# Altium PCB Pulser_Driver_PCB.PcbDoc
Units mil, origin at the board's own origin, x right, y up, seen from the top; angles counter-clockwise.
Board outline 6290 x 3510 mil, 2 copper layers (Top Layer, Bottom Layer), stack 96.8 mil thick; 49 components, 18 nets, 105 pads, 0 vias.
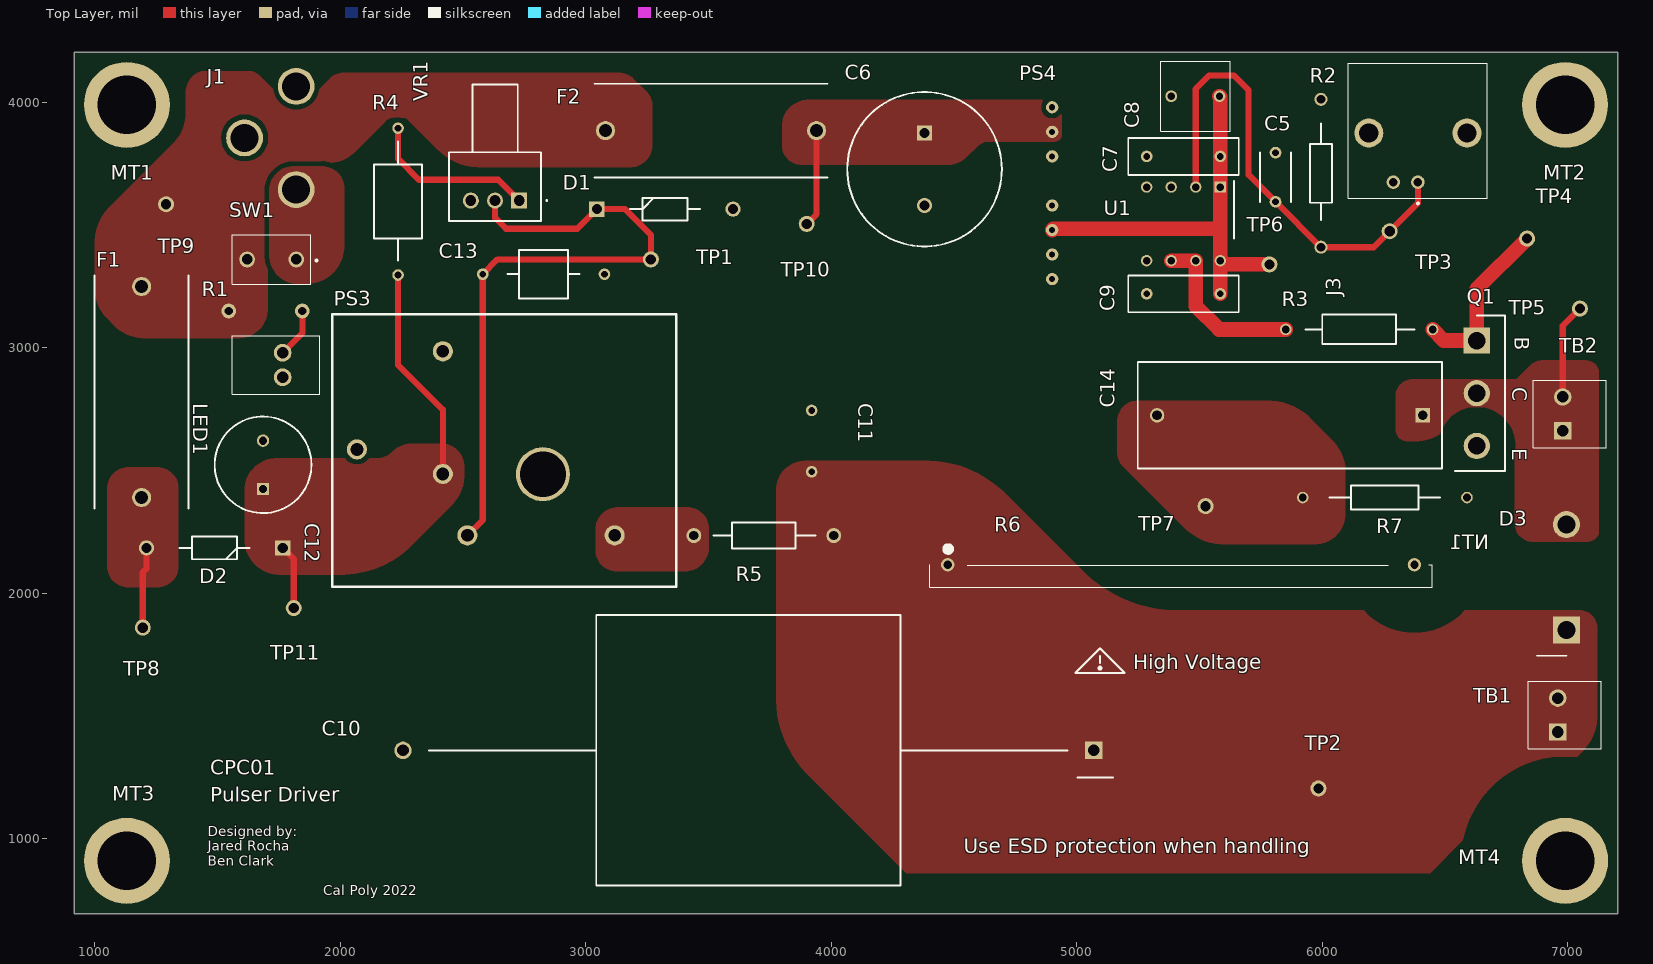
[diagram p0: Top Layer view]
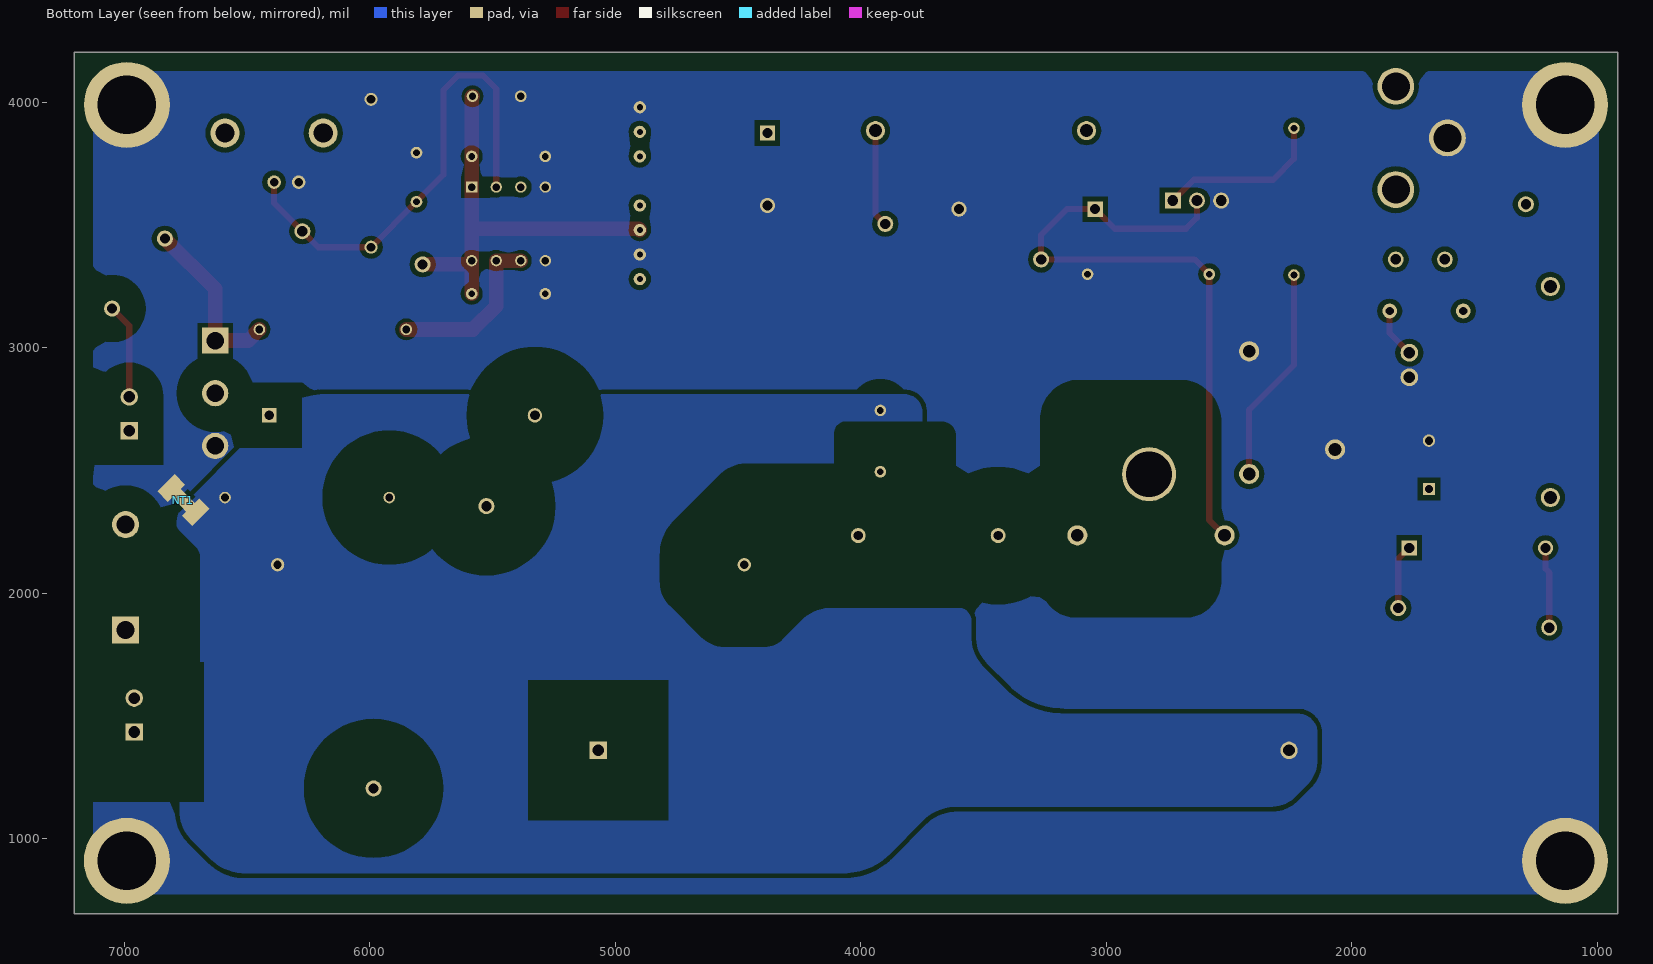
[diagram p1: Bottom Layer view, seen from below]
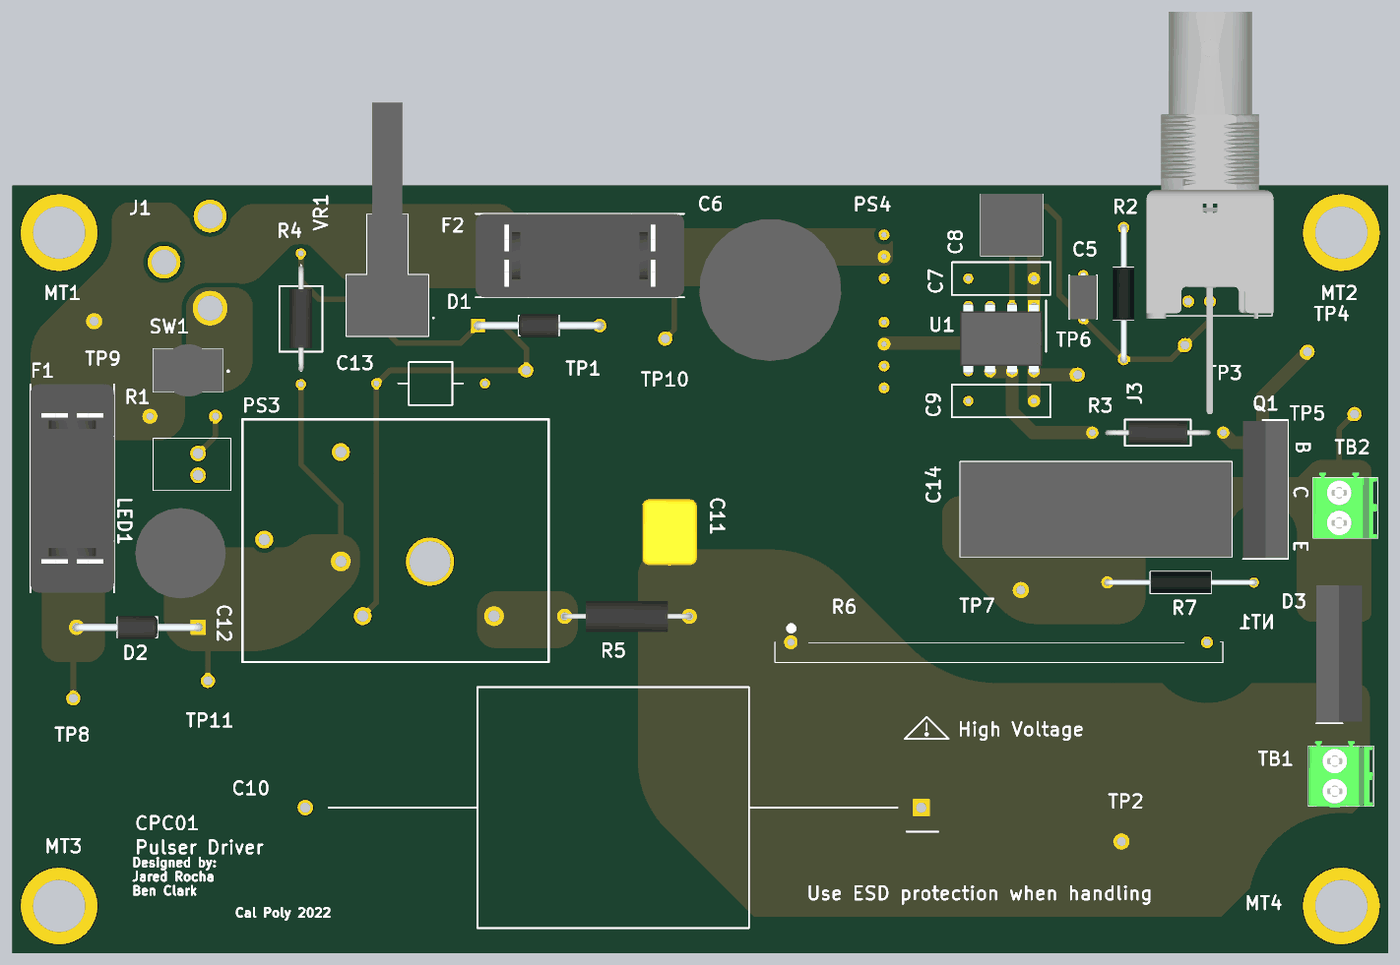
[diagram p2: 3D render of the assembled board from above, using the file's embedded part models]

## Layer stack, top to bottom
Top Solder: solder mask 0.4, Solder Resist, Dk 3.5
Top Layer: signal copper 1.4
Dielectric 1: dielectric 94, FR-4, Dk 4.8
Bottom Layer: signal copper 1.4
Bottom Solder: solder mask 0.4, Solder Resist, Dk 3.5

## Board outline
7205,695 915,695 915,4205 7205,4205

## Design rules (kind name [scope] priority, off if disabled: settings)
BoardOutlineClearance [Not OnLayer('Top Overlay')] p1: gap=78 ignorepadtopadclearanceinfootprint=FALSE except(38: THPad-OutlineEdge THPad-CavityEdge THPad-CutoutEdge THPad-SplitBarrior THPad-SplitContinuation Text-OutlineEdge Text-CavityEdge Text-CutoutEdge Text-SplitBarrior Text-SplitContinuation)
Clearance HV_clear_exception [WithinRoom('HV_cap_clearance_exception') OR WithinRoom('HV_boost_clearance_exception')] p1: gap=250 ignorepadtopadclearanceinfootprint=FALSE except(10: Arc-Text Track-Text SMDPad-Text THPad-Text Via-Text Fill-Text Poly-Text Region-Text Text-Text; 105: Arc-THPad Arc-Hole Track-THPad Track-Hole THPad-THPad THPad-Fill THPad-Poly THPad-Region THPad-Hole Fill-Hole Poly-Hole Region-Hole)
Clearance HV_IGBT_clear [InNetClass('HV_IGBT')] p2: gap=105 ignorepadtopadclearanceinfootprint=FALSE except(10: Arc-Text Track-Text SMDPad-Text THPad-Text Via-Text Fill-Text Poly-Text Region-Text Text-Text Text-Hole)
Clearance HV_general_clear [InNetClass('HV_general')] p3: gap=250 ignorepadtopadclearanceinfootprint=FALSE except(10: Arc-Text Track-Text SMDPad-Text THPad-Text Via-Text Fill-Text Poly-Text Region-Text Text-Text)
Clearance Clearance_1 [All] p4: gap=20 ignorepadtopadclearanceinfootprint=FALSE except(0: Arc-Hole Track-Hole SMDPad-Hole THPad-Hole Via-Hole Fill-Hole Poly-Hole Region-Hole Text-Hole)
Height [All] p1: minheight=0 maxheight=1500 prefheight=500
HoleSize [All] p1: absolutevalues=TRUE maxlimit=250 minlimit=10 maxpercent=80.000 minpercent=20.000
PolygonConnect [All] p1: connectstyle=Direct reliefconductorwidth=10 reliefentries=4 polygonreliefangle="90 Angle" airgapwidth=10
RoomDefinition HV_boost_clearance_exception [False vs False] p1: confinementstyle=ConfineIn formatcopy=TRUE lockcomponents=FALSE outline 2690,2630 3200,2630 3200,2130 2690,2130
RoomDefinition HV_cap_clearance_exception [False vs False] p2: confinementstyle=ConfineIn formatcopy=TRUE lockcomponents=FALSE outline 3875,2790 3965,2790 3965,2455 3875,2455
RoutingVias [All] p1: holewidth=28 width=50 viastyle="Through Hole" minholewidth=28 minwidth=50 maxholewidth=28 maxwidth=50
SolderMaskExpansion [All] p1: expansion=4 istentingtop=FALSE
Width [All] p1: maxlimit=100 minlimit=25 preferedwidth=25 minimp=50.000000 maximp=50.000000 favimp=50.000000
28 further rules are at their usual default settings.

## Classes and differential pairs
net class HV_IGBT: COIL_RETURN
net class HV_general: HV_OUT HV_PIN SNUB
component class Pulser_Top: C10 D3 MT1 MT2 MT3 MT4 NT1 R6 TB1 TB2
component class "IGBT Driver Circuit": C6 C7 C8 C9 C14 PS4 Q1 R3 R7 TP4 TP5 TP6 TP7 U1
component class "Chargin Cap 1.25kV Circuit": C11 C12 C13 D1 D2 PS3 R4 R5 TP1 TP2 TP11 VR1
component class "12V DC": C5 F1 F2 J1 J2 J3 LED1 R1 R2 SW1 TP3 TP8 TP9 TP10

## Components (designator, comment, footprint, x,y, rotation, side; value= is the part's Value field where it differs from the comment)
C5 "C325C201K3G5TA" C325C201K3G5TA 5810,3595 r90 top
C6 "220 uF" CAPPRD750W85D1600H2700 4380,3875.28 r270 top
C7 "Cap" RAD-0.3 5435,3780 r0 top value=0.1uF
C8 "Cap" MKS2D041001K00KSSD 5581.85,4025 r180 top
C9 "Cap" RAD-0.3 5435,3220 r0 top value=0.1uF
C10 "0.68uF" MKP1839468134HQ 5176.88,1360 r180 top
C11 "2.2nF" C331C222KHR5HA 3920,2495 r90 top
C12 "120 uF" CAPPRD500W65D1000H1400 1685,2425 r90 top
C13 "0.1uF" C420C104K5R5TA7200 2580,3300 r0 top
C14 "0.01uF" FKP1U021006B00MSC9 6410,2725 r180 top
D1 "1N5819-E3_54" DIOAD1405W86L465D235 3044.88,3565 r0 top
D2 "1N4933G" DIOAD1405W86L465D235 1765,2185 r180 top
D3 "DSDI60-18A" TO546P530X1586X2594-2P 6995,1850.08 r90 top
F1 "4527" 4527 1190,2820 r270 top
F2 "4527" 4527 3510,3885 r0 top
J1 "57-PJ60" 57-PJ60 1820,3855 r180 top
J3 "031-5640" 031-5640 6390,3675 r0 top
LED1 "550-2407F" 5502407F 1765,2980 r270 top
MT1 "239mil" MTHOLE_239mil 1130,3990 r0 top
MT2 "239mil" MTHOLE_239mil 6990,3990 r0 top
MT3 "239mil" MTHOLE_239mil 1130,910 r0 top
MT4 "239mil" MTHOLE_239mil 6990,910 r0 top
NT1 "Net tie 50mil" NET_TIE_50mil 6759.5,2379.5 r225 bottom net-tie
PS3 "C12" C12 2417.52,2485.98 r180 top
PS4 "AM2G-1218DH30Z" AM2G-1218DH30Z 4900,3980 r270 top
Q1 "IXBX75N170" TO545P521X1594X2566-3P 6630,3029.57 r270 top
R1 "1k" CMF551K0000FKR6 1545,3150 r0 top
R2 "CMF5550R000FKEK70" RESAD1526W69L610D229 5995,3410 r90 top
R3 "2ohm" F2W2D0 5851.57,3075 r0 top
R4 "14k" MFR-25FBF52-14K 2235,3296.57 r90 top
R5 "2M" HHV1WSJT-73-2M 3440,2235 r0 top
R6 "100M" HB3100MFZRE 5425,2070 r0 top
R7 "6.2" RESAD1700W60L700D250 5920.71,2390 r0 top
SW1 "T102SHCQE" T102SHCQE 1820,3360 r90 top
TB1 "1984617" 1984617 6960,1435 r90 top
TB2 "1984617" 1984617 6980,2662.2 r90 top
TP1 "5261" 5261 3265,3360 r180 top
TP2 "5261" 5261 5985,1205 r0 top
TP3 "5261" 5261 6275,3475 r0 top
TP4 "5261" 5261 6835,3445 r270 top
TP5 "5261" 5261 7050,3160 r0 top
TP6 "5261" 5261 5785,3340 r0 top
TP7 "5261" 5261 5525,2355 r0 top
TP8 "5261" 5261 1195,1860 r0 top
TP9 "5261" 5261 1290,3585 r0 top
TP10 "5261" 5261 3900,3505 r0 top
TP11 "5261" 5261 1810,1940 r0 top
U1 "MIC4452YN" DIP762W57P254L952H343Q8N 5435,3505 r270 top
VR1 "P9A1R100FISX1103MA" P9A1R100FISX1103MA 2728.43,3600 r270 top

## Footprints (in the part's own frame and the unit in brackets; to place one, negate y for a bottom-side part, rotate by r counter-clockwise, add the part's x,y. Pads: shape width x height; smd on the part's side, far side on the other; paste and mask are expansions set on the pad)
031-5640 [mm]
  round 1.4 hole 0.9: 1(0,0) 2(-2.54,0)
  round 3 hole 2: 3(5.08,5.08) 4(-5.08,5.08)
  silkscreen extent -7.2,-2.3 7.2,12.33, body extent -7.37,-13.08 7.37,33.66, height 16.07
57-PJ60 [mil]
  round 150 hole 114: 1(0,210.5) 2(210.5,0) 3(0,-210.5)
4527 [mm]
  round 1.97 hole 1.32: 1(-10.92,0) 2(10.92,0)
  silkscreen extent -12.08,-4.85 12.08,4.85, body extent -12.1,-4.85 12.1,4.85, height 10.69
5261 [mm]
  round 1.66 hole 1.06: 1(0,0)
1984617 [mm]
  rect 1.8x1.8 hole 1.2: 1(0,0)
  round 1.8 hole 1.2: 2(3.5,0)
  silkscreen extent -1.75,-4.5 5.25,3.05, body extent -1.88,-4.5 5.82,3.05, height 9.15
5502407F [mm]
  round 1.83 hole 1.22: 1(0,0) 2(2.54,0)
  silkscreen extent -1.78,-5.2 4.32,3.81
AM2G-1218DH30Z [mil]
  round 50 hole 25: 1(0,0) 2(100,0) 3(200,0) 5(400,0) 6(500,0) 7(600,0) 8(700,0)
C12 [mil]
  round 82 hole 52: 1(0,0) 2(0,-500) 3(-100,250) 4(-700,250) 5(350,-100)
  round 220 hole 187: P(-407.48,0.98)
  silkscreen extent -950,-650 450,460
C325C201K3G5TA [mm]
  round 1.217 hole 0.71: 1(0,0) 2(5.08,0)
  silkscreen extent 0,-1.59 5.08,1.59, body extent -0.25,-1.59 5.34,1.59, height 7.72
C331C222KHR5HA [mm]
  round 1.2 hole 0.7: 1(0,0) 2(6.35,0)
  body extent -0.64,-3.18 6.98,3.18, height 10.91
C420C104K5R5TA7200 [mm]
  round 1.2 hole 0.7: 1(0,0) 2(12.6,0)
  silkscreen extent 2.54,-2.5 10.03,2.5, body extent 3.81,-2.54 8.89,2.54, height 5.21
CAPPRD500W65D1000H1400 [mm]
  rect 1.275x1.275 hole 0.85: 1(0,0)
  round 1.275 hole 0.85: 2(5,0)
  silkscreen extent -2.5,-5 7.5,5, body extent -2.75,-5.25 7.75,5.25, height 14
CAPPRD750W85D1600H2700 [mm]
  rect 1.575x1.575 hole 1.05: 1(0,0)
  round 1.575 hole 1.05: 2(7.5,0)
  silkscreen extent -4.25,-8 11.75,8, body extent -4.5,-8.25 12,8.25, height 27
CMF551K0000FKR6 [mil]
  round 60 hole 33.5: 1(0,0) 2(300,0)
DIOAD1405W86L465D235 [mm]
  rect 1.575x1.575 hole 1.05: 1(0,0)
  round 1.575 hole 1.05: 2(14.1,0)
  silkscreen extent 3.43,-1.17 10.67,1.17, body extent -0.43,-1.35 14.48,1.35, height 2.69
DIP762W57P254L952H343Q8N [mm]
  rect 1.17x1.17 hole 0.77: 1(-3.81,3.81)
  round 1.17 hole 0.77: 2(-3.81,1.27) 3(-3.81,-1.27) 4(-3.81,-3.81) 5(3.81,-3.81) 6(3.81,-1.27) 7(3.81,1.27) 8(3.81,3.81)
  silkscreen extent -4.45,5.21 1.52,5.21, body extent -3.95,-4.76 3.95,4.76, height 3.43
F2W2D0 [mm]
  round 1.2 hole 0.8: 1(0,0) 2(15.2,0)
  silkscreen extent 2.03,-1.52 13.33,1.52, body extent 1.47,-1.31 13.77,1.31, height 2.61
FKP1U021006B00MSC9 [mm]
  rect 1.5x1.5 hole 1: 1(0,0)
  round 1.5 hole 1: 2(27.5,0)
  silkscreen extent -2,-5.5 29.5,5.5, body extent -2,-5.5 29.5,5.5, height 21.1
HB3100MFZRE [mm]
  round 1.381 hole 0.85: 1(-24.15,1.175) 2(24.15,1.175)
  silkscreen extent -26,-1.17 26,3.1
HHV1WSJT-73-2M [mm]
  round 1.55 hole 0.95: 1(0,0) 2(14.48,0)
  silkscreen extent 2.03,-1.35 12.57,1.37, body extent -0.31,-1.8 14.78,1.8, height 3.61
MFR-25FBF52-14K [mm]
  round 1.2 hole 0.7: 1(0,0) 2(15.2,0)
  silkscreen extent 1.52,-2.5 13.84,2.5, body extent 1.47,-1.31 13.77,1.31, height 2.61
MKP1839468134HQ [mm]
  rect 1.8x1.8 hole 1.2: 1(2.718,0)
  round 1.8 hole 1.2: 2(74.216,0)
  silkscreen extent 0.75,-14 71.5,14
MKS2D041001K00KSSD [mm]
  round 1.2 hole 0.75: 1(0,0) 2(5,0)
  silkscreen extent -1.1,-3.6 6.1,3.6, body extent -1.1,-3.6 6.1,3.6, height 13.1
MTHOLE_239mil [mil]
  round 350 hole 239: 1(0,0)
NET_TIE_50mil [mil]
  rect 60x100 smd paste-99999 mask+0: 1(-70,0) 2(70,0)
  rect 60x50 smd paste-99999 mask+0: 1(-25,0) 2(30,0)
P9A1R100FISX1103MA [mm]
  rect 1.65x1.65 hole 1.1: 1(0,0)
  round 1.65 hole 1.1: 2(0,-2.5) 3(0,-5)
  silkscreen extent -12,-7.25 2.1,2.9, body extent -25,-7.25 2.1,2.25, height 11.45
RAD-0.3 [mm] "Radial Cap, Thru-Hole; 2 Leads; 0.3 in Pin Spacing"
  round 1.2 hole 0.7: 1(-3.81,0) 2(3.81,0)
  silkscreen extent -5.71,-1.91 5.71,1.91
RESAD1526W69L610D229 [mm]
  round 1.35 hole 0.9: 1(0,0) 2(15.3,0)
  silkscreen extent 2.79,-1.14 12.83,1.14, body extent -0.34,-1.24 15.61,1.24, height 2.48
RESAD1700W60L700D250 [mm]
  round 1.2 hole 0.8: 1(0,0) 2(17,0)
  silkscreen extent 2.79,-1.25 14.22,1.25, body extent -0.3,-1.25 17.3,1.25, height 2.49
T102SHCQE [mm]
  round 1.635 hole 1.09: 1(0,0) 3(0,5.08)
  silkscreen extent -2.54,-2.2 2.54,6.61, body extent -3.05,-1.53 3.05,6.61, height 23.66
TO545P521X1594X2566-3P [mm]
  rect 2.715x2.715 hole 1.81: 1(0,0)
  round 2.715 hole 1.81: 2(5.45,0) 3(10.9,0)
  silkscreen extent -2.62,-2.27 13.51,2.94, body extent -2.52,-2.27 13.42,2.94, height 25.13
TO546P530X1586X2594-2P [mm]
  rect 2.79x2.79 hole 1.86: 1(0,0)
  round 2.79 hole 1.86: 3(10.92,0)
  silkscreen extent -2.66,0 -2.66,3.04, body extent -2.47,-2.26 13.39,3.04, height 25.61

## Part data
C5: "Capacitor 200 pF", Manufacturer_Name=Kemet, Datasheet Link=https://www.kemet.com/specsheet/C325C201K3G5TA, Height=7.62mm, Manufacturer_Part_Number=C325C201K3G5TA
C6: library part EEU-FS2A221B, "Capacitor Polarised 100VDC 220uF 1800mA EEU-FS2A221B", Manufacturer_Name=Panasonic, Mouser Part Number=667-EEU-FS2A221B, Arrow Part Number=EEU-FS2A221B, Arrow Price/Stock=https://www.arrow.com/en/products/eeu-fs2a221b/panasonic, Datasheet Link=http://industrial.panasonic.com/cdbs/www-data/pdf/RDF0000/ABA0000C1255.pdf, Height=27mm, Manufacturer_Part_Number=EEU-FS2A221B, Mouser Price/Stock=https://www.mouser.co.uk/ProductDetail/Panasonic/EEU-FS2A221B?qs=w%2Fv1CP2dgqqAbg7G%252BWfZEw%3D%3D
C7: "Capacitor 0.1 µF ±10% 100V Ceramic Capacitor X7R Axial SA301C104KAA", LatestRevisionDate=17-Jul-2002, LatestRevisionNote="Re-released for DXP Platform.", PackageDescription="Radial Cap, Thru-Hole; 2 Leads; 0.3 in Pin Spacing", PackageReference=RAD-0.3, Published=8-Jun-2000, Publisher="Altium Limited"
C8: library part MKS2D041001K00KSSD, "Capacitor", Manufacturer_Name=WIMA, Datasheet Link=https://componentsearchengine.com/Datasheets/2/MKS2D041001K00KSSD.pdf, Height=13mm, Manufacturer_Part_Number=MKS2D041001K00KSSD
C9: "Capacitor Capacitor 0.1 µF ±10% 100V Ceramic Capacitor X7R Axial SA301C104KAA", LatestRevisionDate=17-Jul-2002, LatestRevisionNote="Re-released for DXP Platform.", PackageDescription="Radial Cap, Thru-Hole; 2 Leads; 0.3 in Pin Spacing", PackageReference=RAD-0.3, Published=8-Jun-2000, Publisher="Altium Limited"
C10: library part MKP1839468134HQ, "Capacitor MKP1839468134HQ", Manufacturer_Name=Vishay, Mouser Part Number=75-MKP1839468134HQ, Datasheet Link=https://www.vishay.com/docs/28162/mkp1839hq.pdf, Height=28mm, Manufacturer_Part_Number=MKP1839468134HQ, Mouser Price/Stock=https://www.mouser.com/Search/Refine.aspx?Keyword=75-MKP1839468134HQ
C11: library part C331C222KHR5HA, "Multilayer Ceramic Capacitors MLCC - Leaded 3000V 2200pF X7R 10% LS=6.35mm"
C12: library part EEU-TP1V121, "Capacitor Polarised", Manufacturer_Name=Panasonic, Datasheet Link=http://industrial.panasonic.com/cdbs/www-data/pdf/RDF0000/ABA0000C1134.pdf, Height=14mm, Manufacturer_Part_Number=EEU-TP1V121
C13: library part C420C104K5R5TA7200, "CAP CER TH 0.1UF 50V X7R AXIAL"
C14: library part FKP1U021006B00MSC9, "Capacitor", Manufacturer_Name=WIMA, Datasheet Link=https://www.mouser.com/datasheet/2/440/e_WIMA_FKP_1-1139839.pdf, Height=21mm, Manufacturer_Part_Number=FKP1U021006B00MSC9
D1: "Schottky Diode", Manufacturer_Name=Vishay, Manufacturer_Part_Number=1N5819-E3/54, Mouser Part Number=625-1N5819-E3, Datasheet Link=https://www.vishay.com/docs/88525/1n5817.pdf, Mouser Price/Stock=https://www.mouser.co.uk/ProductDetail/Vishay-General-Semiconductor/1N5819-E3-54?qs=7w0fSgRKp93guDuu%252B5hJ0Q%3D%3D
D2: "Rectifiers 50V 1A Fast", Manufacturer_Name="ON Semiconductor", Mouser Part Number=863-1N4933G, Arrow Part Number=1N4933G, Arrow Price/Stock=https://www.arrow.com/en/products/1n4933g/on-semiconductor?region=nac, Datasheet Link=https://www.arrow.com/en/products/1n4933g/on-semiconductor, Manufacturer_Part_Number=1N4933G, Mouser Price/Stock=https://www.mouser.co.uk/ProductDetail/onsemi/1N4933G?qs=y2kkmE52mdNCdpmhcWNRQA%3D%3D
D3: "Diode", Manufacturer_Name=LITTELFUSE, Datasheet Link=http://ixapps.ixys.com/DataSheet/96517.pdf, Height=5.3mm, Manufacturer_Part_Number=DSDI60-18A
F1 F2: "Undefined or Miscellaneous", Manufacturer_Name="Keystone Electronics", Mouser2 Part Number=534-4527, Datasheet Link=https://componentsearchengine.com//4527.pdf, Manufacturer_Part_Number=4527, Mouser2 Price/Stock=https://www.mouser.com/Search/Refine.aspx?Keyword=534-4527
J3: "Connector", Manufacturer_Name=Amphenol, Manufacturer_Part_Number=031-5640-1010, Datasheet Link=https://datasheet.datasheetarchive.com/originals/distributors/Datasheets_SAMA/570beec7961c44031375f59c7939d09c.pdf, Height=15.9mm
LED1: "LED", Manufacturer_Name=Dialight, Mouser2 Part Number=645-550-2407F, Datasheet Link=https://componentsearchengine.com//550-2407F.pdf, Height=6.1mm, Manufacturer_Part_Number=550-2407F, Mouser2 Price/Stock=https://www.mouser.com/Search/Refine.aspx?Keyword=645-550-2407F
MT1 MT2 MT3 MT4: library part MTHOLE_239MIL, Manufacturer=(NULL), Part Number=MTHOLE_239, Manufacturer Part Number=(NULL)
NT1: library part NET_TIE_50mil
PS3: "MPN is C12, DC DC conv"
Q1: "Transistor IGBT", Manufacturer_Name="IXYS SEMICONDUCTOR", Mouser Part Number=747-IXBX75N170, Datasheet Link=https://www.littelfuse.com/~/media/electronics/datasheets/discrete_igbts/littelfuse_discrete_igbts_bimosfet_ixb_75n170_datasheet.pdf.pdf, Height=5.21mm, Manufacturer_Part_Number=IXBX75N170, Mouser Price/Stock=https://www.mouser.co.uk/ProductDetail/IXYS/IXBX75N170?qs=6UKyFUzHTllWMFJjywXaHA%3D%3D
R1: library part CMF551K0000FKR6, "Metal Film Resistors - Through Hole 1/2W 1Kohms 1%"
R2: "Resistor 50ohm", Manufacturer_Name=Vishay, Datasheet Link=http://www.vishay.com/docs/31018/cmfind.pdf, Manufacturer_Part_Number=CMF5550R000FKEK70
R3: library part F2W2D0, "RES TH 2 OHM 5% 2W AXIAL"
R4: library part MFR-25FBF52-14K, "RES TH 14K OHM 1% 1/4W AXIAL"
R5: library part HHV1WSJT-73-2M, "RES 2M OHM 5% 1W AXIAL"
R6: library part HB3100MFZRE, "Resistor", Manufacturer_Name="TE Connectivity", Datasheet Link=http://www.te.com/commerce/DocumentDelivery/DDEController?Action=srchrtrv&DocNm=1773310&DocType=DS&DocLang=English, Manufacturer_Part_Number=HB3100MFZRE
R7: library part OD62GJE, "Resistor", Manufacturer_Name=Ohmite, Datasheet Link=https://www.ohmite.com/assets/docs/res_od_of_oa.pdf, Manufacturer_Part_Number=OD62GJE
SW1: "Switch", Manufacturer_Name="C & K COMPONENTS", Datasheet Link=https://componentsearchengine.com/Datasheets/1/T102SHCQE.pdf, Height=23.56mm, Manufacturer_Part_Number=T102SHCQE
TB1 TB2: "Connector", Manufacturer_Name="Phoenix Contact", Mouser Part Number=651-1984617, Arrow Part Number=1984617, Arrow Price/Stock=https://www.arrow.com/en/products/1984617/phoenix-contact?region=nac, Datasheet Link=https://datasheet.datasheetarchive.com/originals/distributors/Datasheets-DGA17/1074867.pdf, Height=9.3mm, Manufacturer_Part_Number=1984617, Mouser Price/Stock=https://www.mouser.co.uk/ProductDetail/Phoenix-Contact/1984617?qs=ATjOrvm3mOhUrGlJQoUcpQ%3D%3D
TP1 TP2 TP3 TP4 TP5 TP6 TP7 TP8 TP9 TP10 TP11: "TEST POINT grabber (BLACK) - MINIATURE"
VR1: "Variable Resistor 10K", Manufacturer_Name=Vishay, Mouser Part Number=72-P9A1RFISX1BB2103M, Datasheet Link=https://www.mouser.com/datasheet/2/427/p9-1763422.pdf, Height=11.35mm, Manufacturer_Part_Number=P9A1R100FISX1103MA, Mouser Price/Stock=https://www.mouser.com/Search/Refine.aspx?Keyword=72-P9A1RFISX1BB2103M

## Nets (pads, with @x,y where several pads share a name; then routed paths per layer and width w, separated by ;. In a path a pad name is that pad's centre, name@x,y a point inside that pad or via, vN(x,y) a via of type N, cw(c..) or ccw(c..) an arc to the next point about the centre after c; other vN are vias at no path point)
12V_IN: C12.1 D2.1 PS3.1 R4.1 TP11.1 | length 1149.8
  Top Layer w25: D2.1 1810,2140 TP11.1 ; R4.1 2235,2930 2417.52,2747.48 PS3.1
COIL_RETURN: C14.1 D3.3 Q1.2 TB2.1 TB2.2 TP5.1 | length 389
  Top Layer w25: TB2.2 6980,3090 TP5.1
FUS1_12VDC: D2.2 F1.2 TP8.1 | length 331.2
  Top Layer w25: TP8.1 1195,2085 1209.88,2099.88 D2.2
FUS2_12VDC: C6.1 F2.2 PS4.2 TP10.1 | length 396.5
  Top Layer w25: TP10.1 3939.92,3544.92 F2.2
GND: C5.2 C6.2 C7.1 C8.2 C9.1 C12.2 C13.2 D1.2 J1.2 J3.2 LED1.2 MT1.1 MT2.1 MT3.1 MT4.1 NT1.1 PS3.2 PS3.5 PS4.1 PS4.7 Q1.3 R2.2 U1.4 U1.5 VR1.3
HV_GND: C10.2 C11.2 NT1.2 R6.2 R7.2
HV_OUT: C10.1 C11.1 D3.1 R5.2 R6.1 TB1.1 TB1.2 TP2.1
HV_PIN: PS3.4 R5.1
NetC7_2: C7.2 C8.1 C9.2 PS4.6 TP6.1 U1.1 U1.8 | length 1684.6
  Top Layer w60: PS4.6 4905,3485 5585,3485 ; C8.1 5585,4021.85 C7.2 U1.1 5585,3485 ; C9.2 U1.8@5585,3340 ; TP6.1 5605.7,3340 5590.7,3355 U1.8 5585,3485
NetF1_1: F1.1 F2.1 R1.1 SW1.3 TP9.1
NetJ1_1: J1.1 SW1.1
NetLED1_1: LED1.1 R1.2 | length 203.1
  Top Layer w25: LED1.1 1845,3060 R1.2
NetQ1_1: Q1.1 R3.2 TP4.1 | length 699.2
  Top Layer w60: R3.2 6495.43,3029.57 Q1.1 6630,3240 TP4.1
NetR3_1: R3.1 U1.6 U1.7 | length 690.9
  Top Layer w60: U1.6 U1.7 5485,3170 5580,3075 R3.1
NetR4_2: R4.2 VR1.1 | length 688.8
  Top Layer w25: R4.2 2235,3770 2320,3685 2643.43,3685 VR1.1
PROG: C13.1 D1.1 PS3.3 TP1.1 VR1.2 | length 2700
  Top Layer w25: PS3.3 2580,2298.46 C13.1 2640,3360 TP1.1 3265,3460 3160,3565 D1.1 2964.88,3485 2675,3485 2630,3530 VR1.2
SNUB: C14.2 R7.1 TP7.1
TRIGGER: C5.1 J3.1 R2.1 TP3.1 U1.2 | length 1979.4
  Top Layer w25: U1.2 5485,4055 5540,4110 5640,4110 5700,4050 5700,3705 C5.1 R2.1 6210,3410 TP3.1 6390,3590 J3.1
pads on no net: J1.3 J3.3 J3.4 PS3.P PS4.3 PS4.5 PS4.8 U1.3

## Polygon pours and split planes (outlines as drawn)
FUS2_12VDC on Top Layer "FUS2_12VDC_L01_P006" (solid, pour order 6): 4910,3840 4644.14,3840 ccw(c4644.13,3769.68) 4594.39,3819.39 4554.79,3779.79 cw(c4470.8,3863.78) 4470.8,3745 3880,3745 cw(c3880,3825) 3800,3825 3800,3905 cw(c3905,3905) 3905,4010 4905.36,4010 cw(c4905.36,3975.36) 4940,3975.36 4940,3870 cw(c4910,3870)
HV_PIN on Top Layer "HV_PIN_L01_P040" (solid, pour order 40): 3040,2260 3040,2175 ccw(c3125,2175) 3125,2090 3405,2090 ccw(c3405,2185) 3500,2185 3500,2265 ccw(c3415,2265) 3415,2350 3130,2350 ccw(c3130,2260)
FUS1_12VDC on Top Layer "FUS1_12VDC_L01_P002" (solid, pour order 2): 1050,2427.5 1050,2110 ccw(c1135,2110) 1135,2025 1255,2025 ccw(c1255,2110) 1340,2110 1340,2427.5 ccw(c1255,2427.5) 1255,2512.5 1135,2512.5 ccw(c1135,2427.5)
COIL_RETURN on Top Layer "COIL_RETURN_L01_P021" (solid, pour order 21): 6791.12,2871.12 6366.12,2871.12 ccw(c6366.12,2805) 6300,2805 6300,2665 ccw(c6345,2665) 6345,2620 6384.64,2620 ccw(c6384.64,2789.85) 6504.75,2669.75 6585,2750 6670,2750 6785,2635 6785,2285 ccw(c6860,2285) 6860,2210 7080,2210 ccw(c7080,2260) 7130,2260 7130,2890 ccw(c7070,2890) 7070,2950 6899.14,2950 ccw(c6899.13,2879.66) 6849.39,2929.39
NetF1_1 on Top Layer "Top Layer-NetF1_1" (solid, pour order 25): 3180,3735 ccw(c3180,3824.99) 3270,3825 3270,3990.86 ccw(c3199.72,3990.87) 3249.39,4040.61 3194.14,4095.86 ccw(c3135.86,4037.58) 3135.86,4120 2010.61,4120 ccw(c2010.61,4046.1) 1958.36,4098.36 1910,4050 1730,4050 1674.14,4105.86 ccw(c1615.91,4047.7) 1615.86,4130 1460,4130 ccw(c1459.99,4040.01) 1370,4040 1370,3955.35 cw(c1198.11,3955.34) 1319.65,3833.79 1061.22,3575.36 ccw(c1209,3427.58) 1000,3427.57 1000,3238.28 ccw(c1164.85,3238.28) 1048.28,3121.71 1081.72,3088.28 ccw(c1198.29,3204.86) 1198.28,3040 1585,3040 ccw(c1585.01,3159.99) 1705,3160 1705,3650 1810,3755 1958.49,3755 ccw(c1958.49,3893.31) 2056.29,3795.51 2184.26,3923.48 cw(c2216.16,3891.6) 2216.17,3936.7 2255.91,3936.7 cw(c2255.93,3906.82) 2277.07,3927.93 2399.66,3805.34 ccw(c2569.47,3975.15) 2569.47,3735
SNUB on Top Layer "SNUB_L01_P039" (solid, pour order 39): 5250,2785 5779.64,2785 cw(c5779.65,2542.72) 5950.96,2714.04 6039.58,2625.41 cw(c5905.83,2491.64) 6095,2491.63 6095,2325 cw(c5970.01,2324.99) 5970,2200 5597.43,2200 cw(c5597.43,2423.14) 5439.64,2265.36 5190.61,2514.39 cw(c5252.43,2576.21) 5165,2576.21 5165,2700 cw(c5250,2700)
HV_OUT on Top Layer "HV_OUT_L01_P019" (solid, pour order 19): 7050,1930 5416.07,1930 cw(c5416.06,2487.84) 5021.61,2093.39 4708.39,2406.61 ccw(c4386.4,2084.66) 4386.36,2540 3895,2540 ccw(c3894.99,2420.01) 3775,2420 3775,1578.99 ccw(c4231.27,1578.99) 3908.64,1256.36 4305,860 6440,860 6870,1290 6995,1290 7058.18,1353.18 ccw(c6908.94,1502.42) 7120,1502.43 7120,1860 ccw(c7050,1860)
12V_IN on Top Layer "12V_IN_L01_P003" (solid, pour order 3): 1610,2420 1610,2220 ccw(c1755,2220) 1755,2075 1999.29,2075 ccw(c1999.29,2487.13) 2290.71,2195.71 2453.79,2358.79 ccw(c2330.15,2482.42) 2505,2482.43 2505,2515 ccw(c2410,2515) 2410,2610 2291.21,2610 ccw(c2291.21,2498.43) 2212.32,2577.32 cw(c2146.36,2643.28) 2146.36,2550 1740,2550 ccw(c1740,2420)
NetJ1_1 on Top Layer "NETJ1_1_L01_P000" (solid, pour order 0): 1710,3640 1710,3380 ccw(c1830,3380) 1830,3260 1860,3260 ccw(c1860,3415) 2015,3415 2015,3650 ccw(c1925,3650) 1925,3740 1810,3740 ccw(c1810,3640)
GND on Bottom Layer "Bottom Layer-GND" (solid, pour order 52): 1155,695 6965,695 7205,935 7205,3965 6965,4205 1155,4205 915,3965 915,935
HV_GND on Bottom Layer "Bottom Layer-HV_GND" (solid, pour order 49): 3611.72,1130 2328.28,1130 cw(c2328.28,1270.71) 2228.79,1171.21 2181.21,1218.79 cw(c2280.71,1318.28) 2140,1318.28 2140,1430 cw(c2220,1430) 2220,1510 3171.52,1510 ccw(c3171.52,1844.31) 3407.92,1607.92 3498.79,1698.79 ccw(c3375.16,1822.41) 3550,1822.43 3550,1888.48 cw(c3601.52,1888.48) 3601.52,1940 4121.72,1940 cw(c4121.72,1775.18) 4238.28,1891.72 4318.79,1811.21 ccw(c4394.14,1886.57) 4394.14,1780 4551.72,1780 ccw(c4551.72,1920.71) 4651.21,1821.21 4778.79,1948.79 ccw(c4679.3,2048.27) 4820,2048.28 4820,2157.57 ccw(c4621.04,2157.58) 4761.72,2298.28 4578.28,2481.72 ccw(c4461.74,2365.18) 4461.72,2530 3820,2530 cw(c3820,2600) 3750,2600 3750,2740 cw(c3820,2740) 3820,2810 6187.57,2810 cw(c6187.58,2514.46) 6396.57,2723.43 6748.79,2371.21 cw(c6656.53,2278.94) 6786.7,2287.9 cw(c6743.14,2284.9) 6774.01,2254.01 6707.07,2187.07 ccw(c6748.28,2145.86) 6690,2145.86 6690,2070 6774.01,1985.99 6774.01,1107.98 cw(c6619.61,1107.97) 6728.79,998.79 6645.36,915.36 cw(c6511.72,1048.99) 6511.72,860 4066.57,860 cw(c4066.57,1117.28) 3884.64,935.36 3745.36,1074.64 ccw(c3611.72,941.01)

## Other copper
Bottom Layer:
  pour cut-out: 3680,2330 4020,2330 ccw(c4020,2420) 4110,2420 4110,2650 ccw(c4060,2650) 4060,2700 3670,2700 ccw(c3670,2640) 3610,2640 3610,2400 ccw(c3680,2400)
  pour cut-out: 2530,2050 ccw(c2680,2050) 2680,1900 3120,1900 ccw(c3120,2050) 3270,2050 3270,2710 ccw(c3110,2710) 3110,2870 2700,2870 ccw(c2700,2700) 2530,2700

## Silkscreen, mask and mechanical layers (free items; w line width, h text height)
Top Overlay:
  circle w10: c5094.8,1695.2 r4.71
  lines w8: 5094.8,1715.2 5094.8,1745.2 ; 4994.8,1675.2 5094.8,1775.2 5194.8,1675.2 4994.8,1675.2
  text "B" at 6785,3045 h60 r270
  text "C" at 6775,2840 h60 r270
  text "E" at 6775,2590 h60 r270
  text "High Voltage" at 5230,1689.99 h60
  text "CPC01" at 1470,1260 h60
  text "Pulser Driver" at 1470,1150 h60
  text "Use ESD protection when handling" at 4540,939.99 h60
  text "Designed by: / Jared Rocha / Ben Clark" at 1460,890 h40
  text "Cal Poly 2022" at 1930,770 h40